# EAGLE board QueenOfHearts (EAGLE 9.7.0)
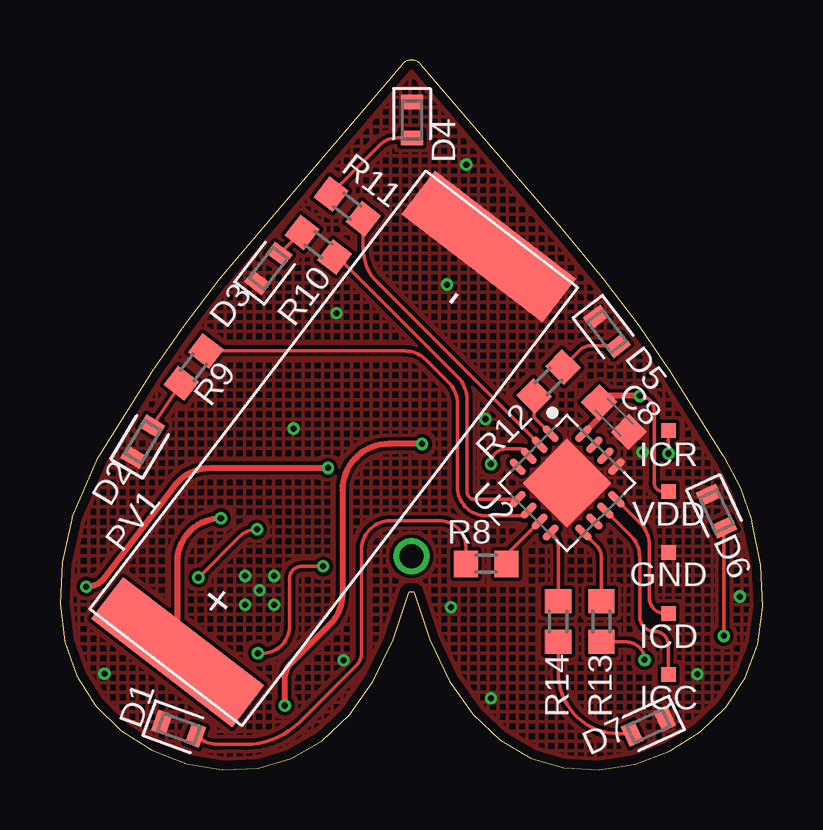
[diagram p0: board, top side]
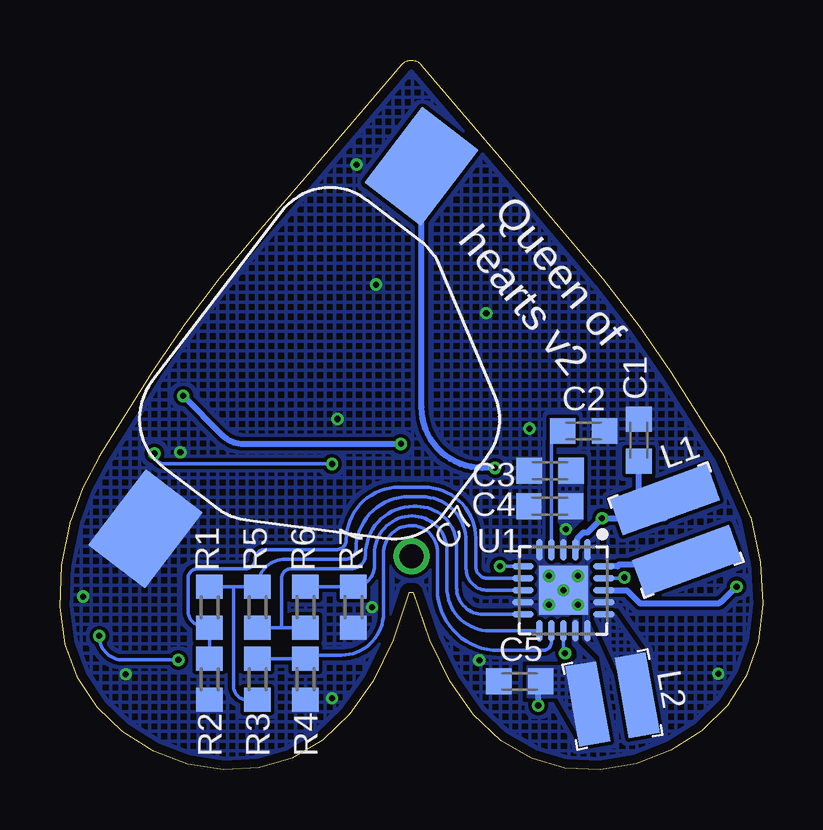
[diagram p1: board, bottom side, seen from below]

Size 29.31 x 29.58 mm. Coordinates in mm from the lower left corner, seen from the top.
Outline: 27.67,13.06 25.42,16.64 24.13,18.52 22.64,20.48 20.95,22.53 19.08,24.69 15.04,29.4 arc100 14.27,29.4 10.24,24.68 6.66,20.46 5.16,18.49 3.85,16.61 1.6,13.02 0.5,10.53 0.1,8.65 0,6.92 0.2,5.34 0.7,3.91 1.5,2.67 2.56,1.63 3.84,0.81 5.28,0.26 6.77,0 8.25,0.07 9.65,0.48 10.93,1.22 12.07,2.29 13.06,3.68 13.89,5.39 14.56,7.41 14.75,7.41 15.42,5.4 16.25,3.7 17.23,2.31 18.36,1.24 19.63,0.49 21.02,0.08 22.49,0 23.98,0.24 25.41,0.78 26.7,1.58 27.77,2.61 28.57,3.83 29.09,5.24 29.31,6.8 29.23,8.52 28.85,10.37 28.36,11.76 27.67,13.06
Copper layers (1*16): Top 0.035559375mm / dielectric 1.6mm / Bottom 0.035559375mm
Design rules "oshpark-2layer *": minimum track width 6mil, minimum drill 10mil, track to track 6mil, track to pad 6mil, pad to pad 6mil, via to via 6mil, smd to smd 6mil, copper to edge 15mil, drill to drill 6mil, minimum pad ring 5mil, minimum via ring 5mil, stop-mask expansion 1.5mil, vias tented up to drill 11mil, thermal gap 10mil

## Footprints (pad centres in the part's own frame; a part is rotated, then mirrored left to right if it is on the bottom)
C0603K = smd 1.05 x 1.08: 1 -0.875,0; 2 0.875,0
MAL219691153E2 = smd 4 x 3: + 9.5,3.5; - -9.5,3.5
LEDC1608X35N = smd 0.612 x 0.912: A 0.75,0; C -0.75,0
TP06SQ = smd 0.6 x 0.6: TP 0,0
WE744031220 = smd 1.6 x 4.3: P$1 -1.35,0; P$2 1.35,0
WE74438335100 = smd 1.3 x 3.4: P$1 -1.05,0; P$2 1.05,0
KXOB25 = smd 2.2 x 7.4: + 10.7,0 | smd 2.3 x 7.4: - -10.6,0
R0603 = smd 1 x 1.1: 1 -0.85,0; 2 0.85,0
QFN50P350X350X90-21T205N = smd 0.896 x 0.264: 1 -1.687,1; 2 -1.687,0.5; 3 -1.687,0; 4 -1.687,-0.5; 5 -1.687,-1; 11 1.687,-1; 12 1.687,-0.5; 13 1.687,0; 14 1.687,0.5; 15 1.687,1 | smd 0.264 x 0.896: 6 -1,-1.687; 7 -0.5,-1.687; 8 0,-1.687; 9 0.5,-1.687; 10 1,-1.687; 16 1,1.687; 17 0.5,1.687; 18 0,1.687; 19 -0.5,1.687; 20 -1,1.687 | smd 2.05 x 2.05: 21 0,0
QFN65P400X400X50-17T260N = smd 0.837 x 0.32: 1 -1.937,0.975; 2 -1.937,0.325; 3 -1.937,-0.325; 4 -1.937,-0.975; 9 1.937,-0.975; 10 1.937,-0.325; 11 1.937,0.325; 12 1.937,0.975 | smd 0.32 x 0.837: 5 -0.975,-1.937; 6 -0.325,-1.937; 7 0.325,-1.937; 8 0.975,-1.937; 13 0.975,1.937; 14 0.325,1.937; 15 -0.325,1.937; 16 -0.975,1.937 | smd 2.6 x 2.6: 17 0,0

## Placement (x,y rotation side)
C1  10uF  [C0603K]  5.18,13.73 90 bottom
C2  10nF  [C0603K]  7.47,14.12 0 bottom
C3  10nF  [C0603K]  8.87,12.46 180 bottom
C4  4.7uF  [C0603K]  8.88,10.98 180 bottom
C5  22uF  [C0603K]  10.14,3.69 180 bottom
C7  MAL219691153E3  [MAL219691153E2]  17.21,15.47 52.7 bottom
C8  100nF  [C0603K]  23.1,14.7 315 top
D1  CHIP-FLAT-R_0603-0.35MM  [LEDC1608X35N]  4.95,1.72 340 top
D2  CHIP-FLAT-R_0603-0.35MM  [LEDC1608X35N]  3.45,13.68 59 top
D3  CHIP-FLAT-R_0603-0.35MM  [LEDC1608X35N]  8.69,20.9 52.5 top
D4  CHIP-FLAT-R_0603-0.35MM  [LEDC1608X35N]  14.67,27.08 270 top
D5  CHIP-FLAT-R_0603-0.35MM  [LEDC1608X35N]  22.8,18.27 307.5 top
D6  CHIP-FLAT-R_0603-0.35MM  [LEDC1608X35N]  27.37,10.78 295 top
D7  CHIP-FLAT-R_0603-0.35MM  [LEDC1608X35N]  24.53,1.82 205 top
GND  TPTP06SQ  [TP06SQ]  25.37,9.06 0 top
ICC  TPTP06SQ  [TP06SQ]  25.37,3.98 0 top
ICD  TPTP06SQ  [TP06SQ]  25.37,6.52 0 top
ICR  TPTP06SQ  [TP06SQ]  25.37,14.14 0 top
L1  WE744031220  [WE744031220]  3.63,9.99 290 bottom
L2  WE74438335100  [WE74438335100]  6.27,2.93 190 bottom
PV1  KXOB25  [KXOB25]  11.42,13.4 232.5 top
R1  [R0603]  23.07,6.78 90 bottom
R2  [R0603]  23.07,3.78 90 bottom
R3  [R0603]  21.07,3.78 270 bottom
R4  [R0603]  19.07,3.78 90 bottom
R5  [R0603]  21.07,6.78 90 bottom
R6  [R0603]  19.07,6.78 270 bottom
R7  [R0603]  17.07,6.78 90 bottom
R8  270R  [R0603]  17.77,8.58 0 top
R9  270R  [R0603]  5.57,16.78 52.5 top
R10  270R  [R0603]  10.77,21.88 322.5 top
R11  270R  [R0603]  11.97,23.48 322.5 top
R12  270R  [R0603]  20.37,16.18 225 top
R13  270R  [R0603]  22.57,6.18 90 top
R14  270R  [R0603]  20.77,6.18 90 top
U1  BQ25570  [QFN50P350X350X90-21T205N]  8.32,7.48 270 bottom
U2  PIC16(L)F1X32X  [QFN65P400X400X50-17T260N]  21.14,11.95 315 top
VDD  TPTP06SQ  [TP06SQ]  25.37,11.6 0 top

## Library data of the parts
C1-C5 C8 = rcl; SPICEPREFIX: C
C7 L1 L2 PV1 U1 U2 = BQ25570
D1-D7 = LED; CATEGORY: LED; COLOR: RED; DESCRIPTION: CHIP LED FLAT; SUB-CATEGORY: CHIP; TYPE: FLAT_TOP
GND ICC ICD ICR VDD = testpad
R1-R14 = rcl; SPICEPREFIX: R

## Nets
GND: C1.2 C2.2 C3.2 C4.2 C5.2 C7.- C8.2 D1.C D2.C D3.C D4.C D5.C D6.C D7.C GND.TP PV1.- R2.1 R4.1 R7.1 U1.1 U1.5 U1.9 U1.15 U1.17 U1.21 U2.13 U2.17
LN1: R8.2 U2.7
LN2: R9.2 U2.6
LN3: R10.2 U2.5
LN4: R11.2 U2.2
LN5: R12.2 U2.1
LN6: R13.2 U2.9
LN7: R14.2 U2.8
N$1: L1.P$2 U1.20
N$2: C1.1 L1.P$1 PV1.+ U1.2
N$3: C2.1 U1.4
N$4: L2.P$1 U1.16
N$5: C3.1 C4.1 U1.3 U1.19
N$6: U1.6 U1.13
N$7: C5.1 C8.1 L2.P$2 U1.14 U2.16 VDD.TP
N$8: C7.+ U1.18
N$10: R1.1 R2.2 U1.7
N$11: R5.1 R6.2 U1.10
N$12: R3.1 R4.2 U1.12
N$13: R6.1 R7.2 U1.11
N$14: ICR.TP U2.3
N$15: ICD.TP U2.12
N$16: ICC.TP U2.11
N$17: D1.A R8.1
N$18: D2.A R9.1
N$19: D3.A R10.1
N$20: D4.A R11.1
N$21: D5.A R12.1
N$22: D6.A R13.1
N$23: D7.A R14.1
VRDRV: R1.2 R3.2 R5.2 U1.8

## Tracks (layer width: path | path; a pad name or v marks a point on that pad's centre or on a via)
GND  (via drill 0.25 pad 0.51)
  other vias: 8.32,7.48 17.97,2.98 7.72,6.88 7.72,8.08 8.92,8.08 8.92,6.88 16.3,6.77 1.86,4.01 11.83,4.56 16.94,25.22 26.57,3.98 9.74,14.22 16.14,20.22 17.74,14.62 11.54,19.02 24.29,13.23 28.34,7.22
  pour Bottom (rank 3, no thermals, hatched): 0.05,0.06 29.89,0.06 29.89,29.9 0.05,29.9
  pour Top (rank 3, no thermals, hatched): 0.17,0.18 30.15,0.18 30.15,30.16 0.17,30.16
LN1
  Top 0.152: U2.7 18.62,8.97 R8.2
LN2
  Top 0.152: R9.2 14.37,17.45 arc-45 15.27,17.08 16.2,16.15 arc-45 16.57,15.25 16.57,11.78 arc90 17.77,10.58 19.31,10.58 U2.6
LN3
  Top 0.152: R10.2 11.59,21.36 16.6,16.35 arc-45 16.97,15.45 16.97,11.58 arc90 17.28,11.27 U2.5
LN4
  Top 0.152: U2.2 13.22,20.33 arc-45 12.64,21.72 R11.2
LN5
  Top 0.152: U2.1 19.77,14.7 R12.2
LN6
  Top 0.152: U2.9 22.39,9.33 arc-45 22.57,8.88 R13.2
LN7
  Top 0.152: U2.8 20.59,9.77 arc-45 20.77,9.32 R14.2
N$1
  Bottom 0.254: U1.20 6.06,8.48 5.99,8.55 3.34,8.55 L1.P$2
N$2  (via drill 0.25 pad 0.51)
  Top 0.254: PV1.+ 4.91,8.69 arc-90 v6.71,10.49
  Bottom 0.254: U1.2 7.73,9.26 7.73,9.65 7.49,9.9 7.3,9.9 v6.71,10.49 4.09,10.49 L1.P$1 5.18,11.26 C1.1
N$3
  Bottom 0.152: U1.4 8.82,13.65 arc90 C2.1
N$4
  Bottom 0.254: L2.P$1 5.14,3.01
  pour Bottom (no thermals, hatched): 5.03,1.66 5.49,1.66 5.49,2.97 5.49,2.97 5.49,2.98 5.49,3 5.5,3 5.5,3 5.5,3.01 5.51,3.02 5.51,3.03 6.99,6.32 6.99,6.5 6.21,6.5 5.03,4.82
N$5  (via drill 0.25 pad 0.51)
  Top 0.152: v5.77,8.01 7.48,9.72 arc-45 v8.22,10.03
  Bottom 0.152: v5.77,8.01 5.8,7.98 U1.19
  pour Bottom (no thermals, hatched): 8.24,9.77 8.25,9.74 8.25,8.86 8.39,8.86 8.39,10.2 8.41,10.22 8.49,10.31 8.49,12.9 7.55,12.9 7.55,10.45 7.56,10.44
N$6  (via drill 0.25 pad 0.51)
  Top 0.152: v8.25,4.86 8.45,4.86 arc90 9.57,5.98 9.57,7.98 arc-90 10.07,8.48 v10.97,8.48
  Bottom 0.152: U1.13 8.32,4.96 arc-90 8.22,4.86 arc-90 8.23,4.86 arc-90 v8.25,4.86 | v10.97,8.48 U1.6
N$7  (via drill 0.25 pad 0.51)
  Top 0.152: v24.17,15.58 arc-90 24.77,14.98 24.77,11.98 arc90 25.15,11.6 VDD.TP
  Top 0.254: v9.37,2.68 9.37,3.85 arc-45 9.6,4.41 11.26,6.07 arc45 11.77,7.31 11.77,11.65 arc-90 13.7,13.58 v15.1,13.58 | U2.16 22.48,14.67 C8.1 22.74,15.58 v24.17,15.58
  Bottom 0.254: C5.1 arc-90 9.37,3.58 v9.37,2.68 | v15.1,13.58 21.64,13.58 arc45 22.54,13.95 v24.17,15.58
  pour Bottom (no thermals, hatched): 7.75,5.27 7.74,5.24 7.04,4.54 6.93,3.7 7.51,1.27 8.5,3.01 8.51,3.02 8.51,3.03 8.51,3.03 8.52,3.04 8.53,3.04 8.53,3.05 8.54,3.05 8.55,3.05 8.56,3.06 8.56,3.06 8.57,3.06 8.58,3.06 9.79,3.06 9.79,4.3 8.19,4.3 8.18,4.3 8.17,4.3 8.16,4.3 8.16,4.31 8.11,4.31 8.1,4.31 8.09,4.31 8.09,4.32 8.08,4.32 8.02,4.34 8.01,4.34 8.01,4.35 8.01,4.35 8,4.36 7.96,4.39 7.95,4.39 7.95,4.4 7.94,4.4 7.94,4.41 7.71,4.64 7.69,4.67 7.69,4.86 7.69,4.87 7.69,4.88 7.69,4.89 7.7,4.89 7.7,4.95 7.7,4.96 7.71,4.96 7.71,4.97 7.71,4.97 7.73,5.03 7.74,5.04 7.74,5.04 7.74,5.05 7.75,5.05 7.78,5.09 7.78,5.1 7.79,5.1 7.79,5.11 7.8,5.12 7.89,5.21 7.89,6.14 7.89,6.18 7.88,6.21 7.86,6.23 7.83,6.26 7.8,6.27 7.77,6.28 7.75,6.27
N$8  (via drill 0.25 pad 0.51)
  Top 0.254: v1.1,7.64 v1.1,7.64 arc52 1.86,8.01 4.8,11.86 arc-53 6.26,12.58 v11.17,12.58
  Bottom 0.254: U1.18 5.67,7.48 5.12,6.93 1.92,6.93 arc-45 1.74,7.01 1.12,7.64 v1.1,7.64 | v11.17,12.58 11.7,12.58 arc90 14.23,15.12 C7.+
N$9  (via drill 1)
  other vias: 14.65,8.9
N$10
  Bottom 0.152: U1.7 11.47,7.98 arc90 11.97,8.48 11.97,9.63 arc-90 14.12,11.78 15.17,11.78 arc-90 17.37,9.58 arc90 17.77,9.18 20.77,9.18 arc-90 21.17,8.78 arc90 21.57,8.38 23.57,8.38 arc-90 23.97,7.98 23.97,6.63 arc-90 23.32,5.98 23.12,5.98 arc90 R1.1 R2.2
N$11
  Bottom 0.152: U1.10 11.67,6.48 arc90 12.77,7.58 12.77,9.33 arc-90 14.43,10.98 14.57,10.98 arc-90 16.57,8.98 arc90 17.17,8.38 19.67,8.38 arc-90 20.07,7.98 20.07,5.93 | R5.1 20.07,5.93 | 20.07,5.93 R6.2
N$12
  Bottom 0.152: U1.12 8.82,5.33 arc90 9.17,4.98 11.03,4.98 arc90 13.57,7.52 13.57,9.08 arc-90 14.67,10.18 arc-90 15.82,9.03 15.82,6.53 arc90 17.57,4.78 19.17,4.78 19.17,4.63 | R3.1 19.17,4.63 | 19.17,4.63 R4.2
N$13
  Bottom 0.152: U1.11 11.38,5.79 arc90 13.17,7.58 13.17,9.13 arc-90 14.62,10.58 arc-90 16.2,9.01 16.2,8.5 arc90 R7.2 R6.1
N$14  (via drill 0.25 pad 0.51)
  Top 0.152: v17.97,12.75 arc-90 18.61,13.38 19.25,13.38 U2.3 | ICR.TP v25.37,13.18
  Bottom 0.152: v17.97,12.75 24.94,12.75 arc90 v25.37,13.18
N$15
  Top 0.152: ICD.TP 25.23,6.52 arc-90 24.57,7.18 24.57,9.37 arc45 24.2,10.27 U2.12
N$16
  Top 0.152: U2.11 23.8,9.75 arc-45 24.17,8.86 24.17,6.38 arc90 24.77,5.78 arc-90 25.37,5.18 ICC.TP
N$17
  Top 0.152: D1.A 5.68,1.43 arc45 6.58,1.06 7.76,1.06 arc45 9.96,1.97 12.4,4.41 arc45 12.57,4.82 12.57,9.18 arc-90 13.77,10.38 15.83,10.38 arc-90 16.92,9.29 R8.1
N$18
  Top 0.152: R9.1 D2.A
N$19
  Top 0.152: R10.1 10.05,22.4 D3.A
N$20
  Top 0.152: R11.1 13.33,26.03 arc-45 14.05,26.33 D4.A
N$21
  Top 0.152: D5.A 22.13,17.67 arc45 21.68,17.49 R12.1
N$22  (via drill 0.25 pad 0.51)
  Top 0.152: R13.1 23.62,5.33 arc-90 v24.37,4.58 | D6.A 27.67,10.08 v27.67,5.58
  Bottom 0.152: v24.37,4.58 26.67,4.58 arc90 v27.67,5.58
N$23
  Top 0.152: R14.1 20.77,4.05 arc90 23.31,1.51 D7.A
VRDRV
  Bottom 0.152: U1.8 11.47,7.48 arc90 12.37,8.38 12.37,9.53 arc-90 14.22,11.38 14.77,11.38 arc-90 16.97,9.18 arc90 17.37,8.78 19.92,8.78 arc-90 R5.2 21.97,7.63 | 21.97,7.63 R1.2 | R3.2 21.52,2.93 arc90 22.07,3.48 22.07,7.53 arc90 21.97,7.63

## Text on the board
bNames: Queen of / hearts v2